# Altium PCB 01.PcbDoc (part 1 of 2)
Units mil, origin at the board's own origin, x right, y up, seen from the top; angles counter-clockwise.
Board outline 1732.26 x 1717.09 mil, 4 copper layers (Top Layer, Layer 1, Layer 2, Bottom Layer), stack 61.855 mil thick; 174 components, 95 nets, 460 pads, 94 vias.
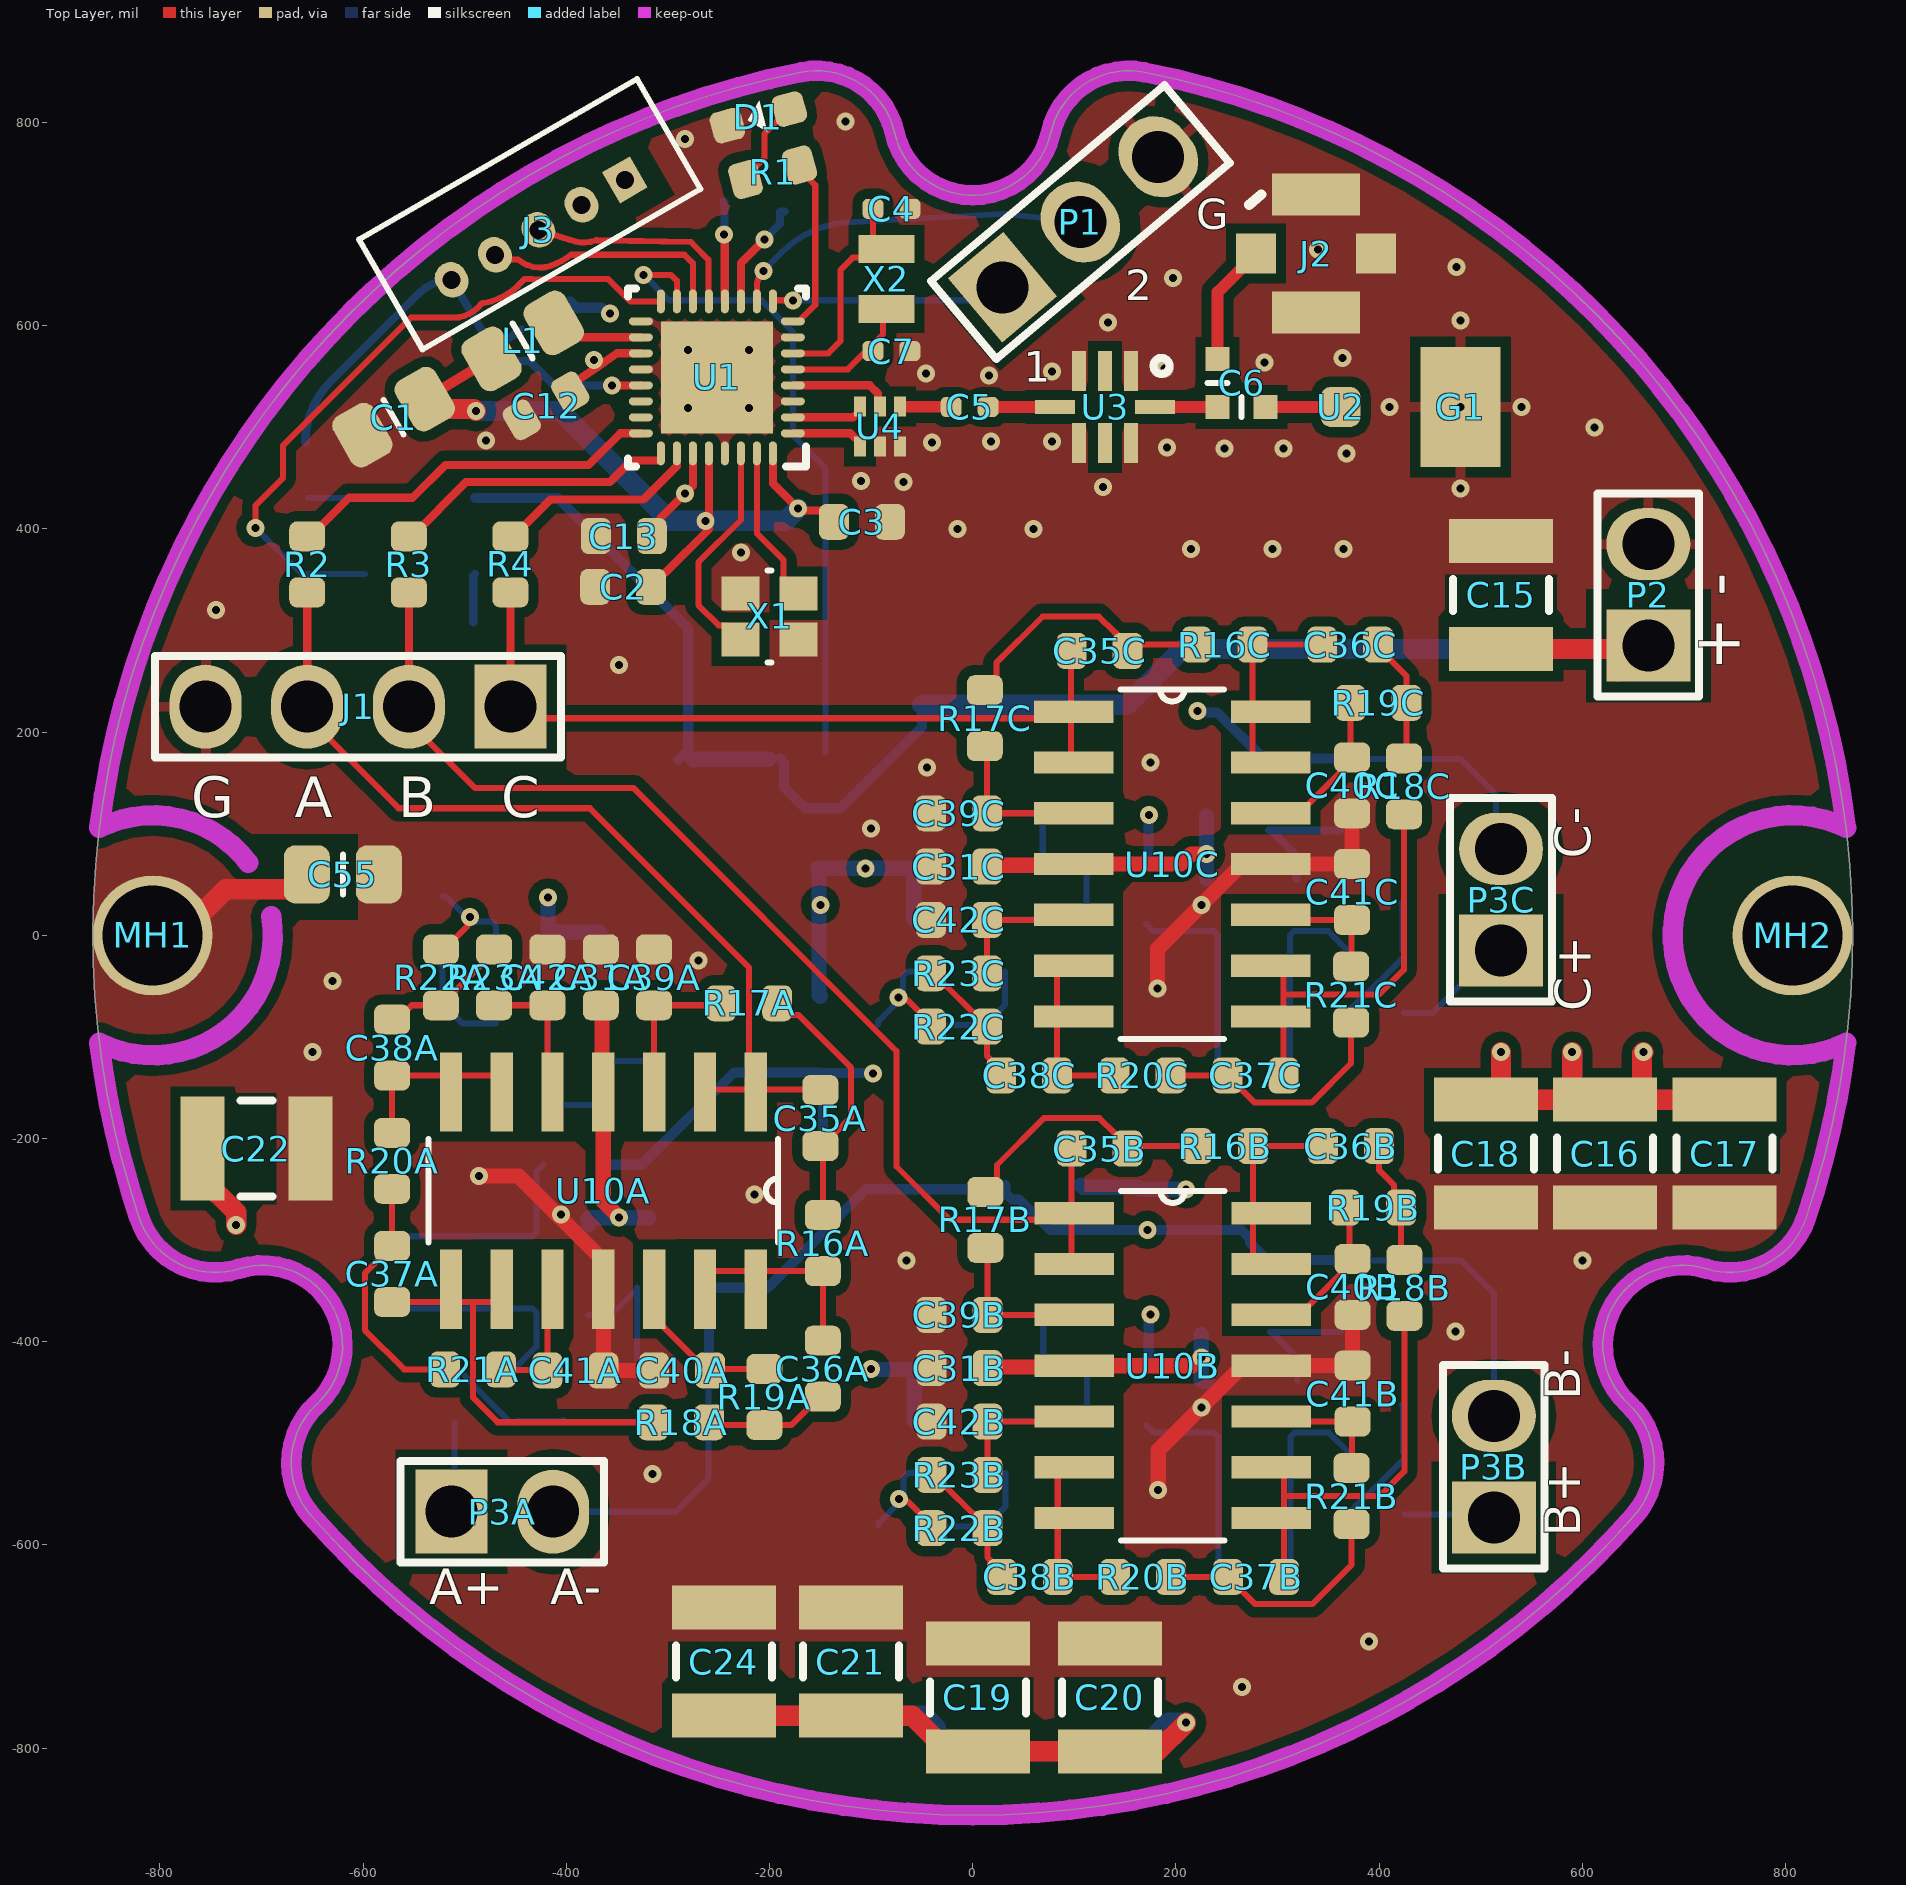
[diagram p0: Top Layer view]
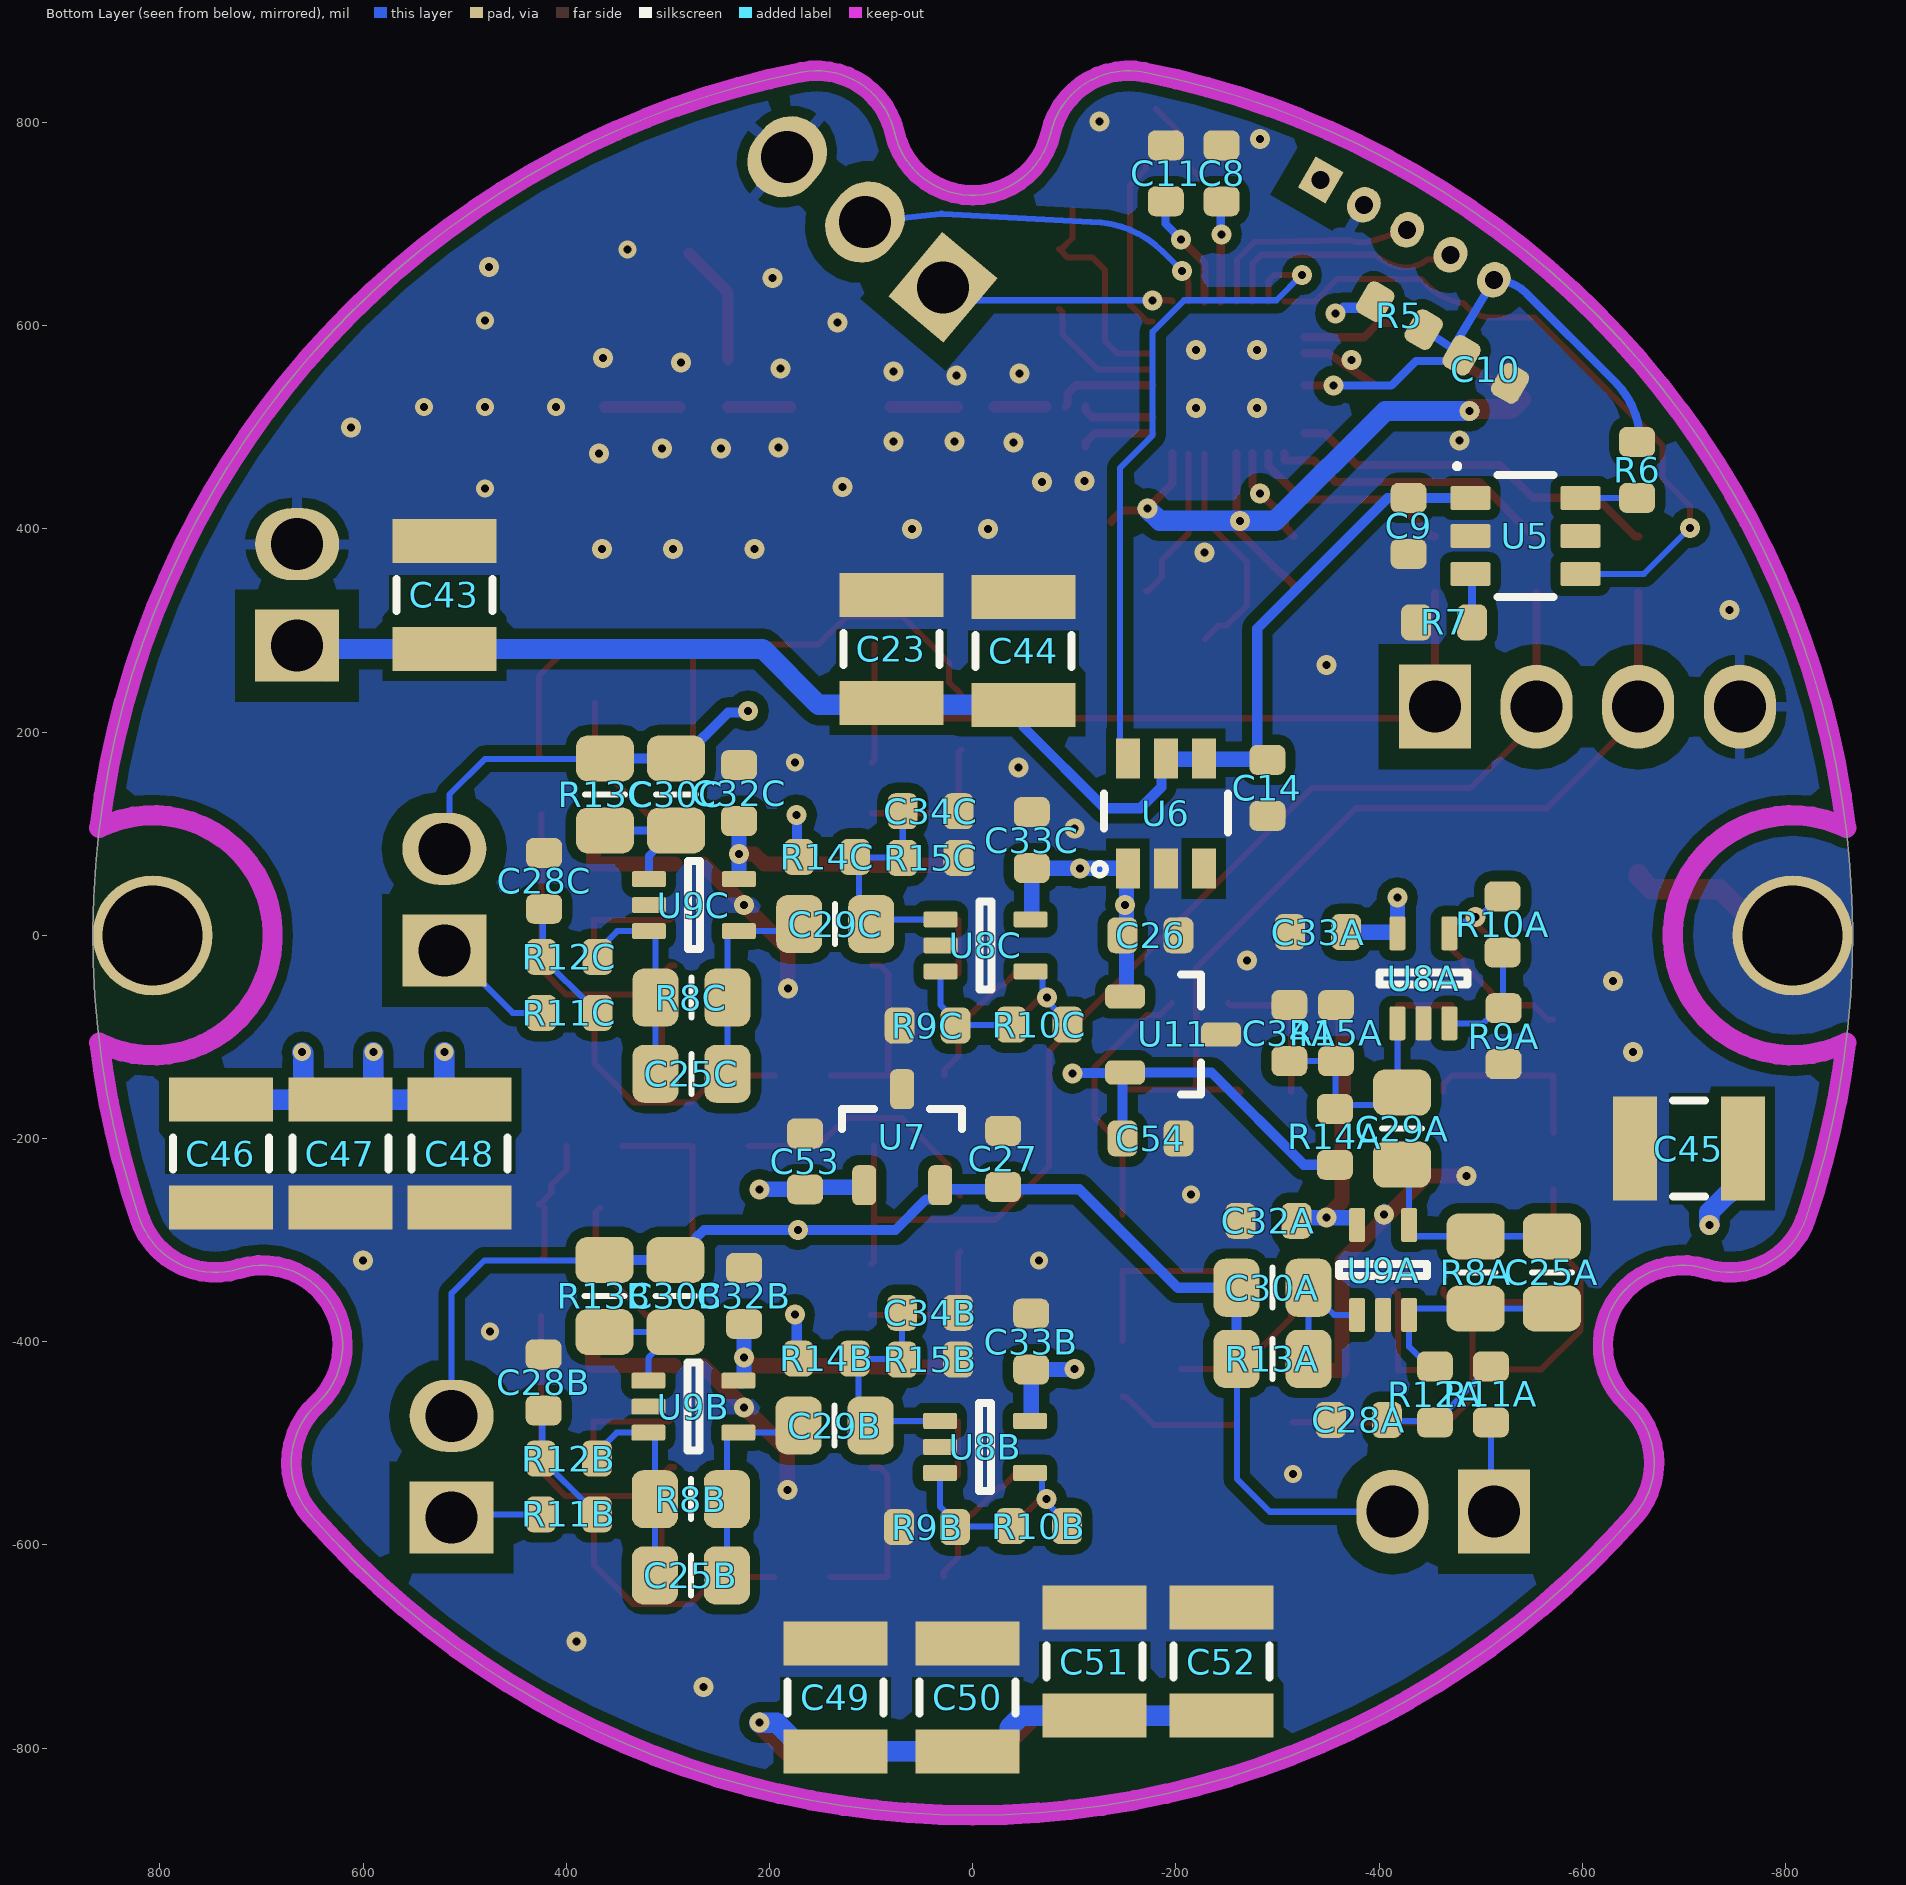
[diagram p1: Bottom Layer view, seen from below]
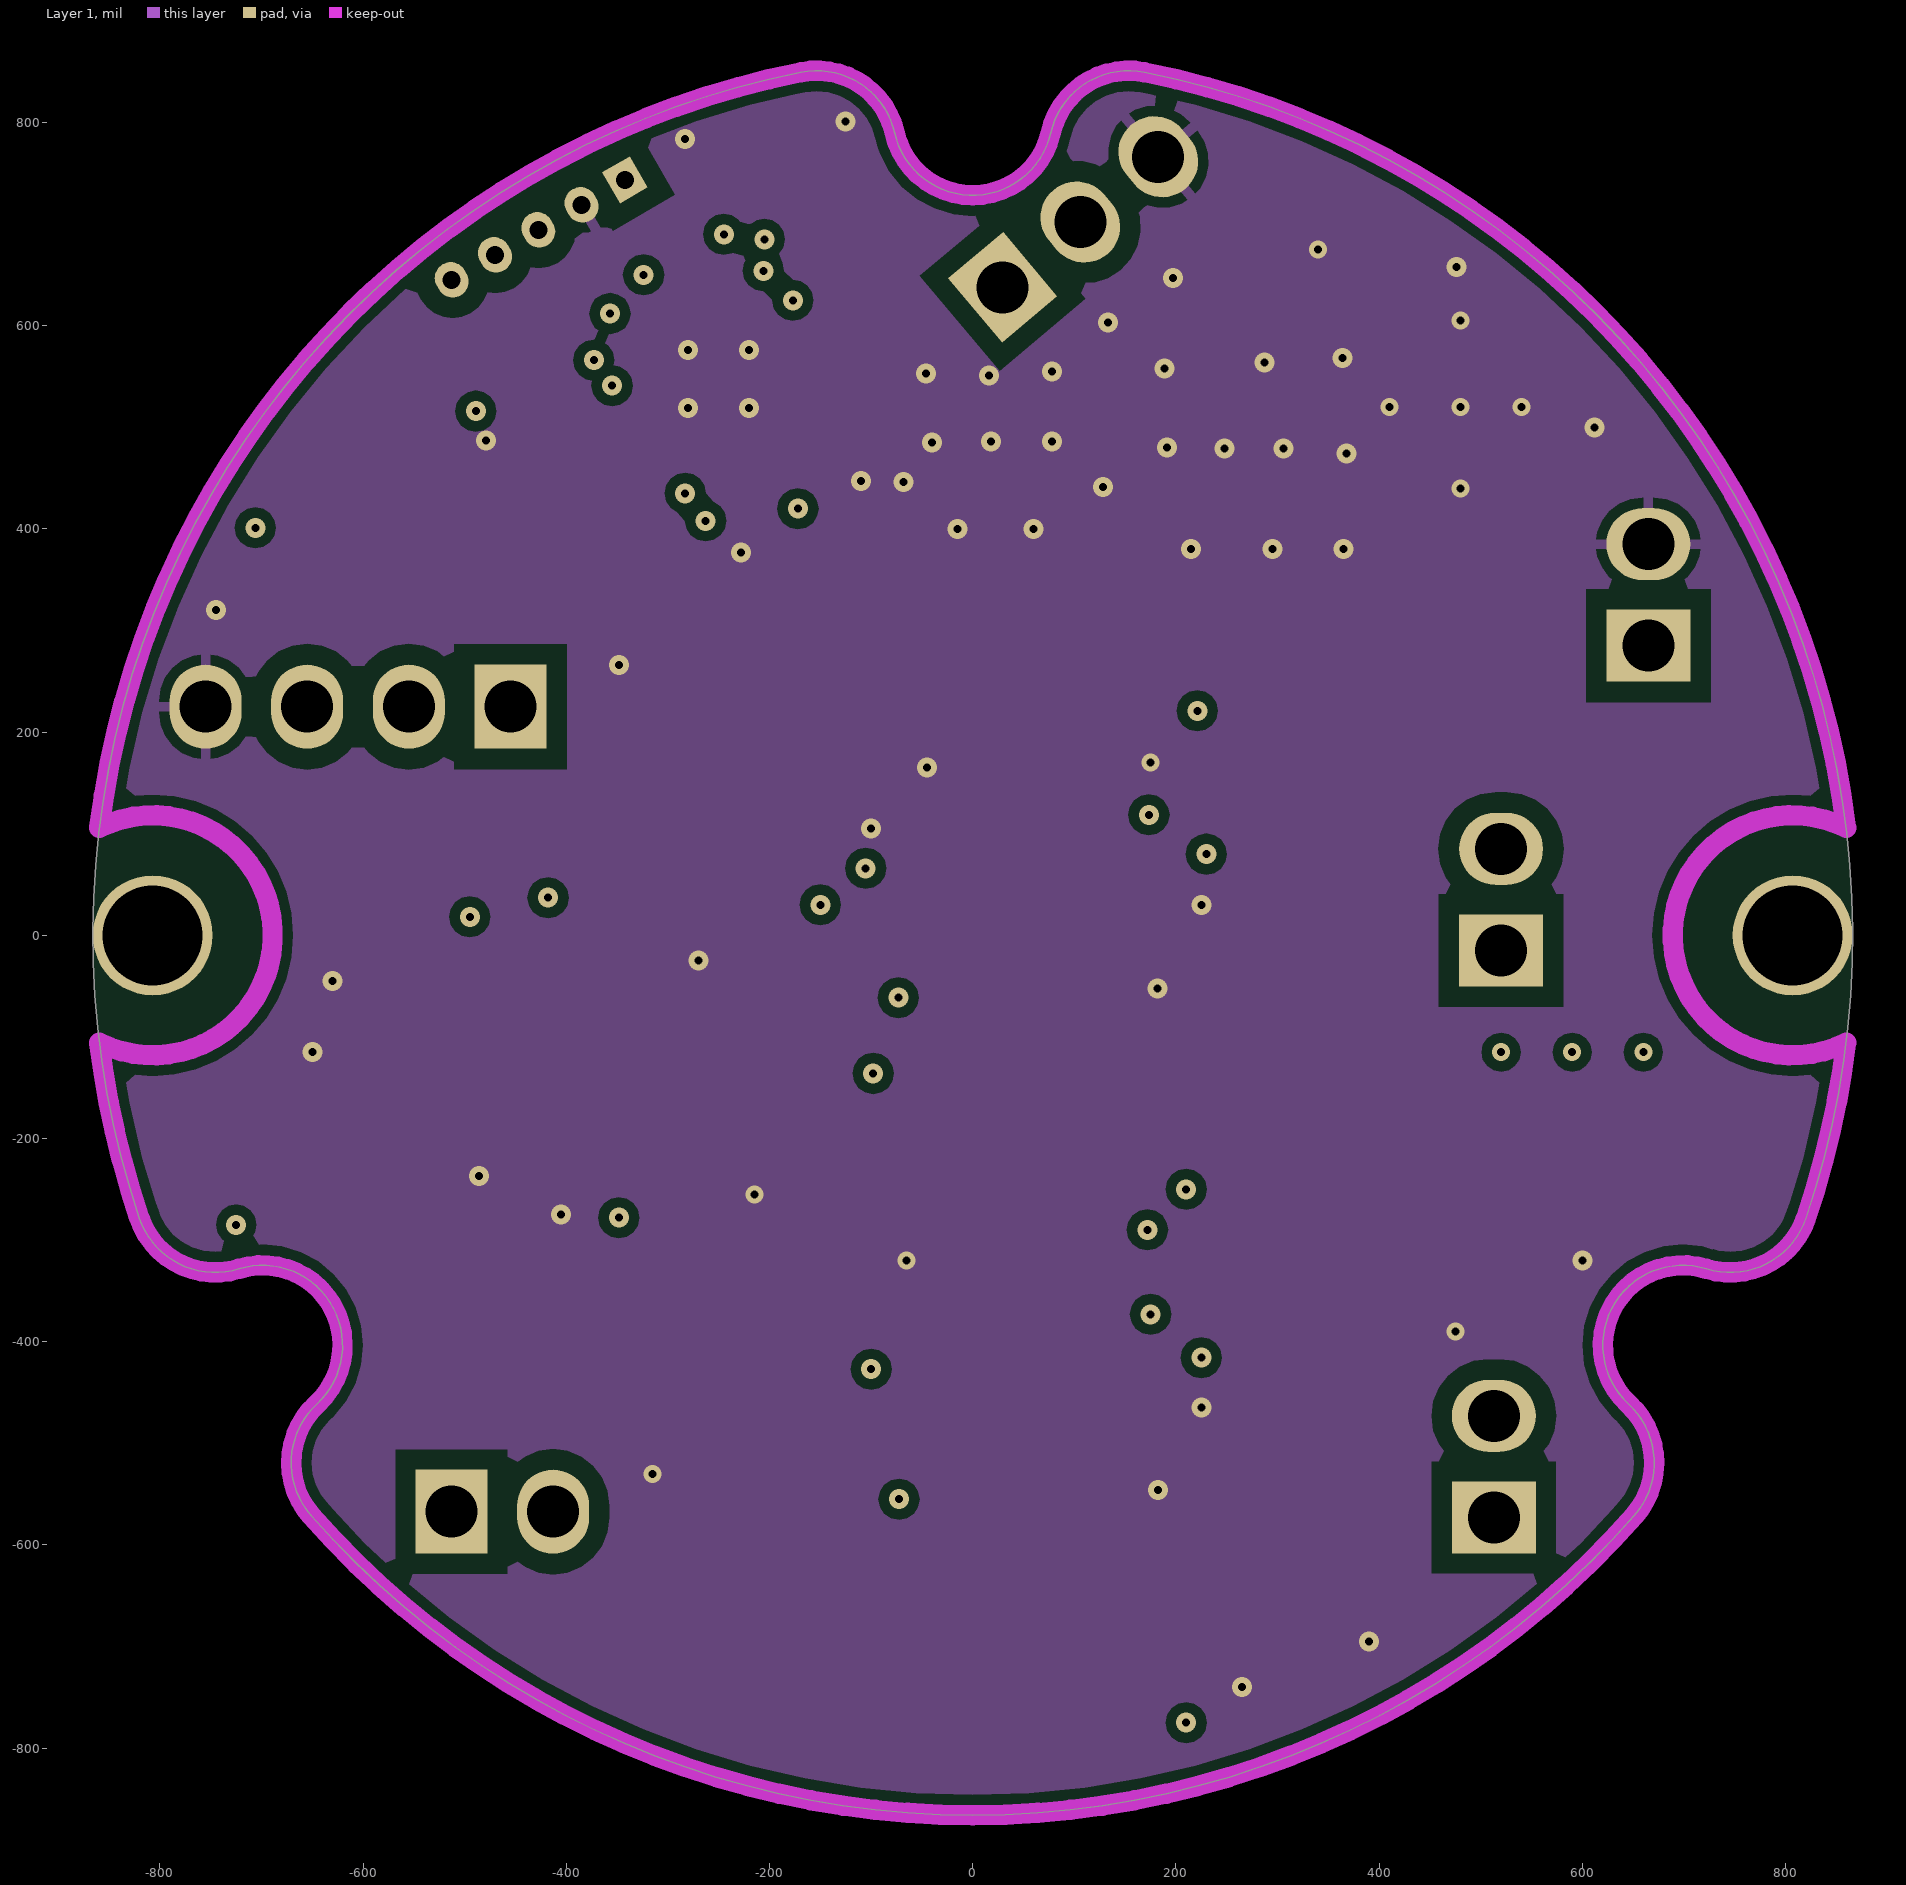
[diagram p2: Layer 1]
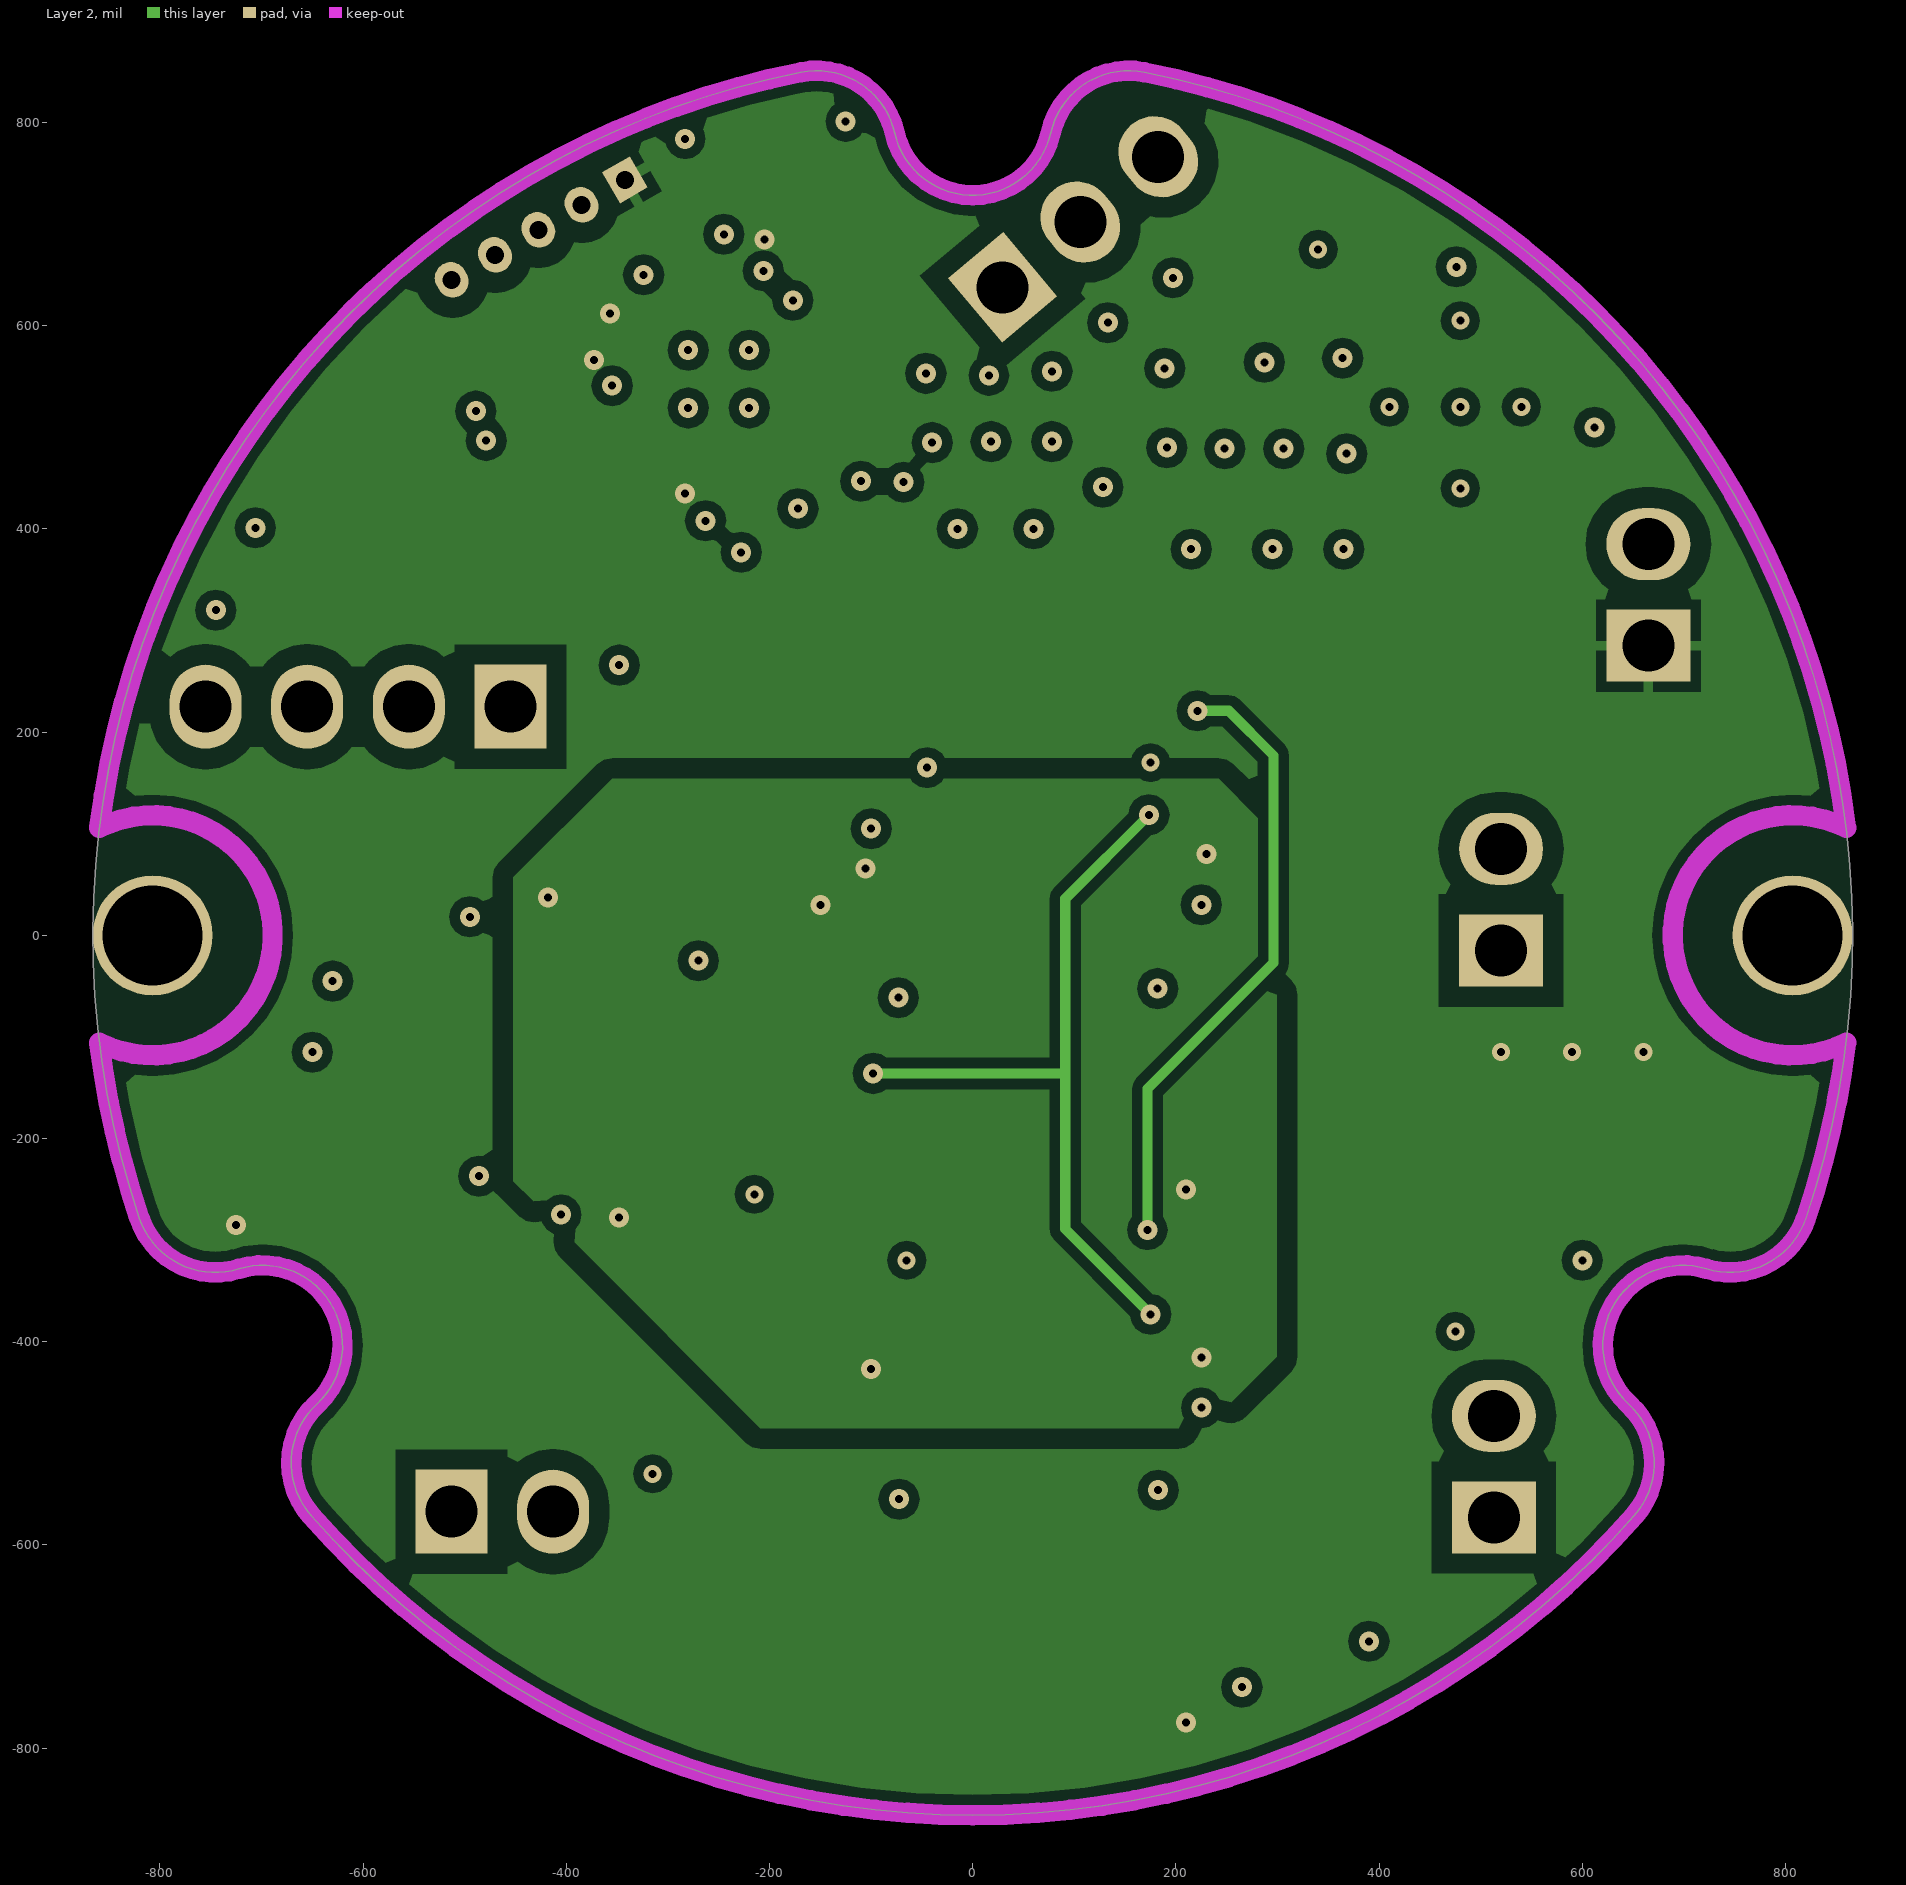
[diagram p3: Layer 2]

## Layer stack, top to bottom
Top Solder: solder mask 0.4, Solder Resist, Dk 3.5
Top Layer: signal copper 1.4
Dielectric 2: prepreg 7.874, PP-006, Dk 4.1
Layer 1: signal copper 0.689
Dielectric 1: dielectric 41.9291, FR-4, Dk 4.8
Layer 2: signal copper 0.689
Dielectric 3: prepreg 7.874, PP-006, Dk 4.1
Bottom Layer: signal copper 1.4
Bottom Solder: solder mask 0.4, Solder Resist, Dk 3.5

## Board outline
-651.23,-571.05 cw(c-592.03,-519.14) -645.5,-461.34 ccw(c-698.97,-403.54) -722.29,-328.33 cw(c-745.61,-253.12) -820.17,-278.44 cw(c-0.01,0.01) -168.95,849.51 cw(c-153.59,772.29) -76.8,789.69 ccw(c-0.01,807.09) 76.78,789.69 cw(c153.58,772.29) 168.94,849.51 cw(c-0.01,0.01) 820.16,-278.44 cw(c745.6,-253.12) 722.27,-328.33 ccw(c698.95,-403.54) 645.48,-461.34 cw(c592.01,-519.14) 651.21,-571.05 cw(c-0.01,0.01)

## Design rules (kind name [scope] priority, off if disabled: settings)
Clearance Clearance_1 [InNamedPolygon('GND_L01_P002')] p1: gap=8 ignorepadtopadclearanceinfootprint=TRUE except(0: Arc-Hole Track-Hole SMDPad-Hole THPad-Hole Via-Hole Fill-Hole Poly-Hole Region-Hole Text-Hole; 6: Arc-Arc Arc-Track Arc-SMDPad Arc-Via Track-Track Track-SMDPad Track-Via SMDPad-SMDPad SMDPad-Via Via-Via; 10: Arc-Text Track-Text SMDPad-Text THPad-Text Via-Text Fill-Text Poly-Text Region-Text Text-Text; 15: Arc-THPad Track-THPad THPad-THPad; 20: SMDPad-THPad THPad-Via)
Clearance [All] p2: gap=10 ignorepadtopadclearanceinfootprint=TRUE except(0: Arc-Hole Track-Hole SMDPad-Hole THPad-Hole Via-Hole Fill-Hole Poly-Hole Region-Hole Text-Hole; 6: Arc-Arc Arc-Track Arc-SMDPad Arc-Via Track-Track Track-SMDPad Track-Via SMDPad-SMDPad SMDPad-Via Via-Via; 15: Track-THPad THPad-THPad; 20: SMDPad-THPad SMDPad-Region THPad-Via THPad-Fill THPad-Poly THPad-Region Fill-Poly Poly-Poly)
ComponentClearance [All] p1: gap=0 collisioncheckmode=3 verticalgap=0 showdistances=FALSE
HoleSize [All] p1: absolutevalues=TRUE maxlimit=248.03 minlimit=7.87 maxpercent=80.000 minpercent=20.000
MinimumSolderMaskSliver [All] p1: minsoldermaskwidth=0
PlaneConnect [All] p1: pad.planeconnectstyle=Relief pad.reliefexpansion=20 pad.reliefentries=4 pad.reliefconductorwidth=10 pad.reliefairgap=10 via.planeconnectstyle=Direct via.reliefexpansion=20 via.reliefentries=4 via.reliefconductorwidth=10 via.reliefairgap=10
PolygonConnect PolygonConnect_2 [InNet('NetC55_2')] p1: connectstyle=Direct reliefconductorwidth=10 reliefentries=4 polygonreliefangle="90 Angle" airgapwidth=10
PolygonConnect PolygonConnect_1 [InComponent('G1')] p2: connectstyle=Relief reliefconductorwidth=10 reliefentries=4 polygonreliefangle="90 Angle" airgapwidth=10
PolygonConnect [All] p3: thpad.connectstyle=Relief thpad.reliefconductorwidth=10 thpad.reliefentries=4 thpad.polygonreliefangle="90 Angle" thpad.airgapwidth=10 smdpad.connectstyle=Direct smdpad.reliefconductorwidth=10 smdpad.reliefentries=4 smdpad.polygonreliefangle="90 Angle" smdpad.airgapwidth=10 via.connectstyle=Direct via.reliefconductorwidth=10 via.reliefentries=4 via.polygonreliefangle="90 Angle" via.airgapwidth=10
RoomDefinition CH3 [InComponentClass('CH3')] p1: confinementstyle=ConfineIn formatcopy=TRUE lockcomponents=FALSE outline 575,-175 575,318.66 -115,318.66 -115,-175
RoomDefinition CH1 [InComponentClass('CH1')] p2: confinementstyle=ConfineIn formatcopy=TRUE lockcomponents=FALSE outline -608.66,-625 -115,-625 -115,60 -608.66,60
RoomDefinition CH2 [InComponentClass('CH2')] p3: confinementstyle=ConfineIn formatcopy=TRUE lockcomponents=FALSE outline 570.55,-668.66 570.55,-175 -114.45,-175 -114.45,-668.66
RoutingVias [All] p1: holewidth=7.87 width=17.72 viastyle="Through Hole" minholewidth=7.87 minwidth=17.72 maxholewidth=248.03 maxwidth=275.59
SilkToSilkClearance [All] p1: silktosilkclearance=0
SilkToSolderMaskClearance [IsPad] p1: minsilkscreentomaskgap=1 clearancetoexposedcopper=TRUE
SolderMaskExpansion [All] p1: expansion=4 istentingtop=FALSE
Width [All] p1: maxlimit=39.37 minlimit=5.91 preferedwidth=10
24 further rules are at their usual default settings.

## Classes and differential pairs
channel class Channel: CH1 CH2 CH3
component class CH3: C25C C28C C29C C30C C31C C32C C33C C34C C35C C36C C37C C38C C39C C40C C41C C42C P3C R8C R9C R10C R11C R12C R13C R14C R15C R16C R17C R18C R19C R20C R21C R22C R23C U8C U9C U10C
component class CH2: C25B C28B C29B C30B C31B C32B C33B C34B C35B C36B C37B C38B C39B C40B C41B C42B P3B R8B R9B R10B R11B R12B R13B R14B R15B R16B R17B R18B R19B R20B R21B R22B R23B U8B U9B U10B
component class CH1: C25A C28A C29A C30A C31A C32A C33A C34A C35A C36A C37A C38A C39A C40A C41A C42A P3A R8A R9A R10A R11A R12A R13A R14A R15A R16A R17A R18A R19A R20A R21A R22A R23A U8A U9A U10A
component class 01: C1 C2 C3 C4 C5 C6 C7 C8 C9 C10 C11 C12 C13 C14 C15 C16 C17 C18 C19 C20 C21 C22 C23 C24 C26 C27 C43 C44 C45 C46 C47 C48 C49 C50 C51 C52 C53 C54 C55 D1 G1 J1 J2 J3 L1 MH1 MH2 P1 P2 R1 R2 R3 R4 R5 R6 R7 U1 U2 U3 U4 U5 U6 U7 U11 X1 X2

## Components (designator, comment, footprint, x,y, rotation, side; value= is the part's Value field where it differs from the comment)
C1 "22uF" S0805C -570,510 r30 top
C2 "100nF" S0603C -344,343 r0 top
C3 "100nF" S0603C -109,407 r180 top
C4 "12pF" S0402C -80,715 r0 top
C5 "100pF" S0402C -3,520 r0 top
C6 "100pF" ST0402C 264.62,520 r0 top
C7 "12pF" S0402C -80,575 r0 top
C8 "1uF" S0603C -245,750 r270 bottom
C9 "100nF" S0603C -429,403 r270 bottom
C10 "100nF" S0603C -505,557 r210 bottom
C11 "100nF" S0603C -190,750 r90 bottom
C12 "100nF" S0603C -420,521 r210 top
C13 "100nF" S0603C -343.44,393 r180 top
C14 "100nF" S0603C -290,145 r270 bottom
C15 "100uF" S1210C 520,335 r270 top
C16 "100uF" S1210C 622.5,-215 r90 top
C17 "100uF" S1210C 740,-215 r90 top
C18 "100uF" S1210C 505,-215 r90 top
C19 "100uF" S1210C 5,-750 r270 top
C20 "100uF" S1210C 135,-750 r270 top
C21 "100uF" S1210C -120,-715 r270 top
C22 "100uF" S1210C -705,-210 r180 top
C23 "100uF" S1210C 80,281.85 r270 bottom
C24 "100uF" S1210C -245,-715 r270 top
C25A "22nF" S0805C -570,-331.89 r270 bottom (schematic designator C25)
C25B "22nF" S0805C 277.44,-630 r0 bottom (schematic designator C25)
C25C "22nF" S0805C 276.89,-136.34 r0 bottom (schematic designator C25)
C26 "1uF" S0603C -175,0 r180 bottom
C27 "1uF" S0603C -30,-220 r90 bottom
C28A "1nF" S0603C -380,-476.89 r0 bottom (schematic designator C28)
C28B "1nF" S0603C 422.44,-440 r90 bottom (schematic designator C28)
C28C "1nF" S0603C 421.89,53.66 r90 bottom (schematic designator C28)
C29A "10uF" S0805C -422.56,-190.33 r270 bottom (schematic designator C29)
C29B "10uF" S0805C 135.88,-482.56 r0 bottom (schematic designator C29)
C29C "10uF" S0805C 135.33,11.1 r0 bottom (schematic designator C29)
C30A "22nF" S0805C -295,-346.89 r0 bottom (schematic designator C30)
C30B "22nF" S0805C 292.44,-355 r90 bottom (schematic designator C30)
C30C "22nF" S0805C 291.89,138.66 r90 bottom (schematic designator C30)
C31A "100nF" S0603C -366.06,-41.33 r90 top (schematic designator C31)
C31B "100nF" S0603C -13.12,-426.06 r180 top (schematic designator C31)
C31C "100nF" S0603C -13.67,67.6 r180 top (schematic designator C31)
C32A "100nF" S0603C -291,-281 r0 bottom (schematic designator C32)
C32B "100nF" S0603C 225,-355 r90 bottom (schematic designator C32)
C32C "100nF" S0603C 230,140 r90 bottom (schematic designator C32)
C33A "100nF" S0603C -340,3.11 r0 bottom (schematic designator C33)
C33B "100nF" S0603C -57.56,-400 r90 bottom (schematic designator C33)
C33C "100nF" S0603C -58.11,93.66 r90 bottom (schematic designator C33)
C34A "1nF" S0603C -311.56,-96.33 r270 bottom (schematic designator C34)
C34B "1nF" S0603C 41.88,-371.56 r0 bottom (schematic designator C34)
C34C "1nF" S0603C 41.33,122.1 r0 bottom (schematic designator C34)
C35A "10nF" S0603C -150,-180 r90 top (schematic designator C35)
C35B "10nF" S0603C 125,-210 r180 top (schematic designator C35)
C35C "10nF" S0603C 125,280 r180 top (schematic designator C35)
C36A "10nF" S0603C -147.56,-426.58 r90 top (schematic designator C36)
C36B "10nF" S0603C 372.13,-207.56 r180 top (schematic designator C36)
C36C "10nF" S0603C 371.58,286.1 r180 top (schematic designator C36)
C37A "10nF" S0603C -571.56,-333.33 r270 top (schematic designator C37)
C37B "10nF" S0603C 278.88,-631.56 r0 top (schematic designator C37)
C37C "10nF" S0603C 278.33,-137.9 r0 top (schematic designator C37)
C38A "10nF" S0603C -571.56,-110.58 r270 top (schematic designator C38)
C38B "10nF" S0603C 56.13,-631.56 r0 top (schematic designator C38)
C38C "10nF" S0603C 55.58,-137.9 r0 top (schematic designator C38)
C39A "82pF" S0603C -313.56,-41.33 r270 top (schematic designator C39)
C39B "82pF" S0603C -13.12,-373.56 r0 top (schematic designator C39)
C39C "82pF" S0603C -13.67,120.1 r0 top (schematic designator C39)
C40A "1nF" S0603C -286,-428.33 r180 top (schematic designator C40)
C40B "1nF" S0603C 373.88,-346 r270 top (schematic designator C40)
C40C "1nF" S0603C 373.33,147.66 r270 top (schematic designator C40)
C41A "3.3nF" S0603C -391,-428.33 r180 top (schematic designator C41)
C41B "3.3nF" S0603C 373.88,-451 r270 top (schematic designator C41)
C41C "3.3nF" S0603C 373.33,42.66 r270 top (schematic designator C41)
C42A "8.2nF" S0603C -418.56,-41.33 r270 top (schematic designator C42)
C42B "8.2nF" S0603C -13.12,-478.56 r0 top (schematic designator C42)
C42C "8.2nF" S0603C -13.67,15.1 r0 top (schematic designator C42)
C43 "100uF" S1210C 520,335 r270 bottom
C44 "100uF" S1210C -50,280 r270 bottom
C45 "100uF" S1210C -705,-210 r180 bottom
C46 "100uF" S1210C 740,-215 r90 bottom
C47 "100uF" S1210C 622.5,-215 r90 bottom
C48 "100uF" S1210C 505,-215 r90 bottom
C49 "100uF" S1210C 135,-750 r270 bottom
C50 "100uF" S1210C 5,-750 r270 bottom
C51 "100uF" S1210C -120,-715 r270 bottom
C52 "100uF" S1210C -245,-715 r270 bottom
C53 "1uF" S0603C 165,-222.44 r90 bottom
C54 "1uF" S0603C -175,-200 r180 bottom
C55 "1nF" S0805C -620,60 r180 top
D1 "MHT192WDT-C2" LED0603 -211,805 r15 top
G1 "PAD" P3X2 480.12,520 r0 top
J1 "Header 4" CP1X4 -455,225 r180 top
J2 "IPEX" molex-73412 338,671 r270 top
J3 "530470510" 1.25MM_P5 -342.38,743.61 r300 top
L1 "6.8uH" S0805L -443,585 r30 top
MH1 "HOLE_PTH" Pad_2-5_3 -807.09,0 r0 top locked
MH2 "HOLE_PTH" Pad_2-5_3 807.09,0 r0 top locked
P1 "Header 3" CP1X3 29.4,637.72 r40 top
P2 "Header 2" CP1X2 665,285 r90 top
P3A "Header 2" CP1X2 -513,-567.33 r0 top (schematic designator P3)
P3B "Header 2" CP1X2 512.88,-573 r90 top (schematic designator P3)
P3C "Header 2" CP1X2 520,-15 r90 top (schematic designator P3)
R1 "330R" S0603R -197,751 r195 top
R2 "0R" S0603R -655,365 r90 top
R3 "0R" S0603R -555,365 r90 top
R4 "0R" S0603R -455,365 r90 top
R5 "100K" S0603R -420,610 r30 bottom
R6 "0R" S0603R -654,458 r90 bottom
R7 "10K" S0603R -464,308 r0 bottom
R8A "100M" S0805R -495,-331.89 r90 bottom (schematic designator R8)
R8B "100M" S0805R 277.44,-555 r180 bottom (schematic designator R8)
R8C "100M" S0805R 276.89,-61.34 r180 bottom (schematic designator R8)
R9A "100K" S0603R -522.56,-99.33 r270 bottom (schematic designator R9)
R9B "100K" S0603R 44.88,-582.56 r0 bottom (schematic designator R9)
R9C "100K" S0603R 44.33,-88.9 r0 bottom (schematic designator R9)
R10A "24.9K" S0603R -521.56,10.67 r270 bottom (schematic designator R10)
R10B "24.9K" S0603R -65.12,-581.56 r0 bottom (schematic designator R10)
R10C "24.9K" S0603R -65.67,-87.9 r0 bottom (schematic designator R10)
R11A "1K" S0603R -510,-451.89 r90 bottom (schematic designator R11)
R11B "1K" S0603R 397.44,-570 r180 bottom (schematic designator R11)
R11C "1K" S0603R 396.89,-76.34 r180 bottom (schematic designator R11)
R12A "1K" S0603R -455,-451.89 r90 bottom (schematic designator R12)
R12B "1K" S0603R 397.44,-515 r180 bottom (schematic designator R12)
R12C "1K" S0603R 396.89,-21.34 r180 bottom (schematic designator R12)
R13A "100M" S0805R -295,-416.89 r180 bottom (schematic designator R13)
R13B "100M" S0805R 362.44,-355 r270 bottom (schematic designator R13)
R13C "100M" S0805R 361.89,138.66 r270 bottom (schematic designator R13)
R14A "200K" S0603R -356.56,-198.33 r90 bottom (schematic designator R14)
R14B "200K" S0603R 143.88,-416.56 r180 bottom (schematic designator R14)
R14C "200K" S0603R 143.33,77.1 r180 bottom (schematic designator R14)
R15A "330k" S0603R -357.56,-96.33 r90 bottom (schematic designator R15)
R15B "330k" S0603R 41.88,-417.56 r180 bottom (schematic designator R15)
R15C "330k" S0603R 41.33,76.1 r180 bottom (schematic designator R15)
R16A "47.5K" S0603R -147.56,-302.86 r90 top (schematic designator R16)
R16B "47.5K" S0603R 248.41,-207.56 r180 top (schematic designator R16)
R16C "47.5K" S0603R 247.86,286.1 r180 top (schematic designator R16)
R17A "110K" S0603R -220,-66.89 r180 top (schematic designator R17)
R17B "110K" S0603R 12.44,-280 r270 top (schematic designator R17)
R17C "110K" S0603R 11.89,213.66 r270 top (schematic designator R17)
R18A "17.4K" S0603R -287,-479.33 r0 top (schematic designator R18)
R18B "17.4K" S0603R 424.88,-347 r90 top (schematic designator R18)
R18C "17.4K" S0603R 424.33,146.66 r90 top (schematic designator R18)
R19A "34.8K" S0603R -205,-454.33 r90 top (schematic designator R19)
R19B "34.8K" S0603R 394,-268 r180 top (schematic designator R19)
R19C "34.8K" S0603R 399.33,228.66 r180 top (schematic designator R19)
R20A "10.7K" S0603R -571.56,-221.96 r270 top (schematic designator R20)
R20B "10.7K" S0603R 167.51,-631.56 r0 top (schematic designator R20)
R20C "10.7K" S0603R 166.96,-137.9 r0 top (schematic designator R20)
R21A "26.1K" S0603R -492,-427.33 r0 top (schematic designator R21)
R21B "26.1K" S0603R 372.88,-552 r90 top (schematic designator R21)
R21C "26.1K" S0603R 372.33,-58.34 r90 top (schematic designator R21)
R22A "10K" S0603R -523.56,-41.33 r270 top (schematic designator R22)
R22B "10K" S0603R -13.12,-583.56 r0 top (schematic designator R22)
R22C "10K" S0603R -13.67,-89.9 r0 top (schematic designator R22)
R23A "17.8K" S0603R -471.06,-41.33 r270 top (schematic designator R23)
R23B "17.8K" S0603R -13.12,-531.06 r0 top (schematic designator R23)
R23C "17.8K" S0603R -13.67,-37.4 r0 top (schematic designator R23)
U1 "CC1310F128RSMR" RSM0032B_NV -251.87,549.2 r180 top
U2 "ANTENNA_PCB" P1X1 362,520 r0 top
U3 "0900LP15B0063" 8P0805 155.8,555.43 r270 top
U4 "0850BM14E0016" 6P0603 -71.63,520.37 r270 top
U5 "TPL5010DDCR" DDC0006A_N -544,393 r180 bottom
U6 "TPS22860DBVR" DBV0006A_N -190,120 r90 bottom
U7 "ISL21080DIH309Z-TK" SOT-23 69.4,-198.76 r90 bottom
U8A "TLV333IDCK" DCK0005A_N -443.56,-42.33 r90 bottom (schematic designator U8)
U8B "TLV333IDCK" DCK0005A_N -12.12,-503.56 r180 bottom (schematic designator U8)
U8C "TLV333IDCK" DCK0005A_N -12.67,-9.9 r180 bottom (schematic designator U8)
U9A "OPA313IDCKR" DCK0005A_N -403.95,-329.44 r90 bottom (schematic designator U9)
U9B "OPA313IDCKR" DCK0005A_N 274.99,-463.95 r180 bottom (schematic designator U9)
U9C "OPA313IDCKR" DCK0005A_N 274.44,29.71 r180 bottom (schematic designator U9)
U10A "TLV4333IDR" D14 -363.56,-251.33 r270 top (schematic designator U10)
U10B "TLV4333IDR" D14 196.88,-423.56 r0 top (schematic designator U10)
U10C "TLV4333IDR" D14 196.33,70.1 r0 top (schematic designator U10)
U11 "ISL21080DIH309Z-TK" SOT-23 -197.24,-97.6 r180 bottom
X1 "24MHZ" SMD-2016 -200,314 r270 top
X2 "32.768k" SMD-2012 -85,646 r90 top

## Footprints (in the part's own frame and the unit in brackets; to place one, negate y for a bottom-side part, rotate by r counter-clockwise, add the part's x,y. Pads: shape width x height; smd on the part's side, far side on the other; paste and mask are expansions set on the pad)
1.25MM_P5 [mm]
  rect 0.9x0.8 hole 0.45: 1(0,0)
  oval 0.9x0.8 hole 0.45: 2(0,-1.25) 3(0,-2.5) 4(0,-3.75) 5(0,-5)
  silkscreen extent -2.03,-6.5 1.14,1.52, body extent -2.06,-6.48 1.14,1.52, height 4.28
6P0603 [mm]
  rect 0.5x0.3 smd: 1(0,0) 2(0,-0.5) 3(0,-1) 4(1,-1) 5(1,-0.5) 6(1,0)
  body extent 0.1,-1.3 0.9,0.3, height 0.6
8P0805 [mm]
  rect 1x0.35 smd: 1(0,0) 2(0,-0.65) 3(0,-1.3) 5(1.8,-1.3) 6(1.8,-0.65) 7(1.8,0)
  rect 0.35x1 smd: 4(0.9,-1.9) 8(0.9,0.6)
  silkscreen extent -0.33,0.56 0.07,0.96, body extent 0.25,-1.65 1.52,0.38, height 0.6
CP1X2 [mm]
  rect 1.8x2.1 hole 1.3: 1(0,0)
  oval 1.8x2.1 hole 1.3: 2(2.54,0)
  silkscreen extent -1.27,-1.27 3.81,1.27
CP1X3 [mm]
  rect 1.8x2.1 hole 1.3: 1(0,0)
  oval 1.8x2.1 hole 1.3: 2(2.54,0) 3(5.08,0)
  silkscreen extent -1.27,-1.27 6.35,1.27
CP1X4 [mm] "Connector; Header; 4 Position"
  rect 1.8x2.1 hole 1.3: 1(0,0)
  oval 1.8x2.1 hole 1.3: 2(2.54,0) 3(5.08,0) 4(7.62,0)
  silkscreen extent -1.27,-1.27 8.89,1.27
D14 [mil]
  rect 78x22 smd: 1(-97,150) 2(-97,100) 3(-97,50) 4(-97,0) 5(-97,-50) 6(-97,-100) 7(-97,-150) 8(97,-150) 9(97,-100) 10(97,-50) 11(97,0) 12(97,50) 13(97,100) 14(97,150)
  silkscreen extent -51,-172 51,172, body extent -122,-172 122,172, height 69
DBV0006A_N [mm]
  rect 1x0.6 smd paste+0 mask+0.051: 1(-1.375,0.95) 2(-1.375,0) 3(-1.375,-0.95) 4(1.375,-0.95) 5(1.375,0) 6(1.375,0.95)
  silkscreen extent -1.55,-1.55 0.5,1.8, body extent -0.76,-1.4 0.76,1.4, height 0.25
DCK0005A_N [mm]
  rrect25% 0.85x0.4 smd: 1(-1.125,0.65) 2(-1.125,0) 3(-1.125,-0.65) 4(1.125,-0.65) 5(1.125,0.65)
  silkscreen extent -0.15,-1.1 0.15,1.1, body extent -0.71,-1.07 0.71,1.07, height 1
DDC0006A_N [mm]
  rrect17% 1x0.6 smd: 1(-1.375,0.95) 2(-1.375,0) 3(-1.375,-0.95) 4(1.375,-0.95) 5(1.375,0) 6(1.375,0.95)
  silkscreen extent -1.76,-1.52 0.7,1.8, body extent -1.19,-1.17 1.22,1.19, height 1
LED0603 [mm]
  rrect50% 0.8x0.8 smd: 1(-0.8,0) 2(0.8,0)
  silkscreen extent -0.27,-0.4 0.13,0.4, body extent -0.85,-0.45 0.85,0.45, height 0.8
molex-73412 [mm]
  rect 1x1 smd: 1(0,-1.5) 3(0,1.5)
  rect 1.05x2.2 smd: 2(1.475,0) 4(-1.475,0)
  silkscreen extent -1.47,-1.68 -1.22,-1.37, body extent -1.5,-1.54 1.5,1.54, height 1.5
P1X1 [mm]
  rrect50% 1x1 smd: 1(0,0)
P3X2 [mm]
  rect 2x3 smd: 1(0,0)
Pad_2-5_3 [mm]
  round 3 hole 2.5: 1(0,0)
RSM0032B_NV [mm]
  oval 0.6x0.2 smd paste+0 mask+0.051: 1(-1.9,1.4) 2(-1.9,1) 3(-1.9,0.6) 4(-1.9,0.2) 5(-1.9,-0.2) 6(-1.9,-0.6) 7(-1.9,-1) 8(-1.9,-1.4) 17(1.9,-1.4) 18(1.9,-1) 19(1.9,-0.6) 20(1.9,-0.2) 21(1.9,0.2) 22(1.9,0.6) 23(1.9,1) 24(1.9,1.4)
  oval 0.2x0.6 smd paste+0 mask+0.051: 9(-1.4,-1.9) 10(-1,-1.9) 11(-0.6,-1.9) 12(-0.2,-1.9) 13(0.2,-1.9) 14(0.6,-1.9) 15(1,-1.9) 16(1.4,-1.9) 25(1.4,1.9) 26(1,1.9) 27(0.6,1.9) 28(0.2,1.9) 29(-0.2,1.9) 30(-0.6,1.9) 31(-1,1.9) 32(-1.4,1.9)
  rect 2.8x2.8 smd paste-1.387 mask+0.051: 33(0,0)
  silkscreen extent -2.23,-2.23 2.23,2.23, body extent -2.03,-2.03 2.03,2.03, height 0.25
S0402C [mm]
  rrect50% 0.524x0.5 smd: 1(-0.462,0) 2(0.462,0)
  body extent -0.55,-0.3 0.55,0.3, height 0.6
S0603C [mm]
  rrect50% 0.75x0.9 smd: 1(-0.7,0) 2(0.7,0)
  body extent -0.87,-0.47 0.87,0.47, height 0.85
S0603R [mm]
  rrect50% 0.75x0.9 smd: 1(-0.7,0) 2(0.7,0)
  body extent -0.87,-0.47 0.87,0.47, height 0.85
S0805C [mm]
  rrect50% 1.151x1.451 smd: 1(-0.9,0) 2(0.9,0)
  silkscreen extent 0,-0.5 0,0.5, body extent -1.1,-0.72 1.1,0.72, height 1.45
S0805L [mm]
  rrect50% 1.151x1.451 smd: 1(-0.9,0) 2(0.9,0)
  silkscreen extent 0,-0.5 0,0.5, body extent -1.1,-0.72 1.1,0.72, height 1.45
S0805R [mm]
  rrect50% 1.151x1.451 smd: 1(-0.9,0) 2(0.9,0)
  silkscreen extent 0,-0.5 0,0.5, body extent -1.1,-0.72 1.1,0.72, height 1.45
S1210C [mm] "Chip Capacitor, Body 3.2x2.5mm, IPC High Density"
  rect 1.1x2.6 smd: 1(-1.35,0) 2(1.35,0)
  Top Layer pour cut-out: -0.508,-1.397 0.508,-1.397 0.508,1.397 -0.508,1.397
  silkscreen extent -0.4,-1.2 0.4,1.2, body extent -1.65,-1.27 1.65,1.27, height 2.5
SMD-2012 [mm]
  rect 0.7x1.4 smd: 1(-0.75,0) 2(0.75,0)
  body extent -1.05,-0.63 1.05,0.63, height 0.6
SMD-2016 [mm]
  rect 0.85x0.95 smd: 1(-0.575,0.725) 2(-0.575,-0.725) 3(0.575,-0.725) 4(0.575,0.725)
  silkscreen extent -1.15,-0.05 1.15,0.05, body extent -1.14,-1.27 1.14,1.27, height 0.61
SOT-23 [mm]
  rrect50% 1x0.6 smd: 1(-1.2,0.95) 2(-1.2,-0.95) 3(1.2,0)
  silkscreen extent 0.2,-1.5 0.7,1.5, body extent -1.16,-1.45 1.21,1.45, height 1
ST0402C [mm]
  rect 0.6x0.61 smd: 1(-0.6,0)
  rect 0.6x0.6 smd: 2(0.6,0) 3(-0.6,1.2)
  silkscreen extent -0.85,-0.25 0,0.6, body extent -0.55,-0.3 0.55,0.3, height 0.6

## Part data
C1: library part 22uF/0805/16V, "精度 ±20%  / 容值 22uF  / 额定电压 16V  / 温漂系数（介质材料) X5R", A_Manufacturer=元六, Manufacturer=FH(风华), Package=0805, A_Code="J CT41-0805-2R2-16V-226M", A_ComType=二类电容, Code=0805X226M160NT, CompType=Capacitor, DistributorCode=C129302
C2 C3 C9 C10 C11 C12 C13 C14 C31A C31B C31C C32A C32B C32C C33A C33B C33C: library part 100nF/0603/50V, "精度 ±10%  / 容值 100nF  / 额定电压 50V  / 温漂系数（介质材料) X7R", A_Manufacturer=元六, Manufacturer=FH(风华), Package=0603, A_Code="J CT41-0603-2R1-50V-104K", A_ComType=二类电容, Code=0603B104K500NT, CompType=Capacitor, DistributorCode=C30926
C4 C7: library part 12pF/0402/50V, "精度 ±1%  / 容值 12pF  / 额定电压 50V  / 温漂系数（介质材料) C0G", A_Manufacturer=元六, Manufacturer=FH(风华), Package=0402, A_Code="J CC41-0402-CG-50V-120J", A_ComType=一类电容, Code=0402CG120F500NT, CompType=Capacitor, DistributorCode=C182477
C5: library part 100pF/0402/50V, "精度 ±5%  / 容值 100pF  / 额定电压 50V  / 温漂系数（介质材料) C0G", A_Manufacturer=元六, Manufacturer=FH(风华), Package=0402, A_Code="J CC41-0402-CG-50V-101J", A_ComType=一类电容, Code=0402CG101J500NT, CompType=Capacitor, DistributorCode=C1546
C6: library part 100pF/0402/T, "精度 ±5%  / 容值 100pF  / 额定电压 50V  / 温漂系数（介质材料) C0G", A_Manufacturer=元六, Manufacturer=FH(风华), Package=0402, A_Code="J CC41-0402-CG-50V-101J", A_ComType=一类电容, Code=0402CG101J500NT, CompType=Capacitor, DistributorCode=C1546
C8 C26 C27 C53 C54: library part 1uF/0603/50V, "精度 ±10%  / 容值 1uF  / 额定电压 50V  / 温漂系数（介质材料) X7R", A_Manufacturer=元六, Manufacturer=FH(风华), Package=0603, A_Code="J CT41-0603-2R1-50V-105M", A_ComType=二类电容, Code=0603B105K500NT, CompType=Capacitor, DistributorCode=C90540
C15 C16 C17 C18 C19 C20 C21 C22 C23 C24 C43 C44 C45 C46 C47 C48 C49 C50 C51 C52: library part 100uF/1210/6.3V, "精度 ±20%  / 容值 100uF  / 额定电压 6.3V  / 温漂系数（介质材料) X5R", A_Manufacturer=元六, Manufacturer=muRata(村田), Package=1210, A_Code="J CT41-1210-2R2-10V-107M", Code=GRM32ER60J107ME20L, CompType=Capacitor, DistributorCode=C88154
C25A C25B C25C C30A C30B C30C: library part 22nF/0805/50V, "精度 ±5%  / 容值 22nF  / 额定电压 50V  / 温漂系数（介质材料) C0G", A_Manufacturer=元六, Manufacturer=TDK, Package=0805, A_Code="J CC41-0805-CG-50V-223J", A_ComType=一类类电容, Code=C2012C0G1H223JT000N, CompType=Capacitor, DistributorCode=C342593
C28A C28B C28C C34A C34B C34C C40A C40B C40C: library part 1nF/0603/50V, "精度 ±5%  / 容值 1nF  / 额定电压 50V  / 温漂系数（介质材料) C0G", A_Manufacturer=元六, Manufacturer=FH(风华), Package=0603, A_Code="J CC41-0603-CG-50V-102J", Code=0603CG102J500NT, CompType=Capacitor, DistributorCode=C1636
C29A C29B C29C: library part 10uF/0805/16V, "精度 ±10%  / 容值 10uF  / 额定电压 16V  / 温漂系数（介质材料) X7R", A_Manufacturer=元六, Manufacturer=FH(风华), Package=0805, A_Code="J CT41-0805-2R2-16V-106M", A_ComType=二类电容, Code=0805B106K160NT, CompType=Capacitor, DistributorCode=C92341
C35A C35B C35C C36A C36B C36C C37A C37B C37C C38A C38B C38C: library part 10nF/0603/C0G/50V, "精度 ±5%  / 容值 10nF  / 额定电压 50V  / 温漂系数（介质材料) C0G", A_Manufacturer=元六, Manufacturer=FH(风华), Package=0603, A_Code="J CC41-0603-CG-50V-103J", Code=0603CG103J500NT, CompType=Capacitor, DistributorCode=C82282
C39A C39B C39C: library part 82pF/0603/C0G/50V, "精度 ±5%  / 容值 82pF  / 额定电压 50V  / 温漂系数（介质材料) C0G", A_Manufacturer=元六, Manufacturer=FH(风华), Package=0603, A_Code="J CC41-0603-CG-50V-820J", Code=0603CG820J500NT, CompType=Capacitor, DistributorCode=C1683
C41A C41B C41C: library part 3.3nF/0603/50V, "精度 ±5%  / 容值 3.3nF  / 额定电压 50V  / 温漂系数（介质材料) C0G", A_Manufacturer=元六, Manufacturer=FH(风华), Package=0603, A_Code="J CC41-0603-CG-50V-332J", Code=0603CG332J500NT, CompType=Capacitor, DistributorCode=C190576
C42A C42B C42C: library part 8.2nF/0603/C0G, "精度 ±5%  / 容值 8.2nF  / 额定电压 50V  / 温漂系数（介质材料) C0G", A_Manufacturer=元六, Manufacturer=TDK, Package=0603, A_Code="J CC41-0603-CG-50V-822J", Code=C1608C0G1H822JT000N, CompType=Capacitor, DistributorCode=C445716
C55: library part 1nF/0805/250V, "精度 ±10%  / 容值 1nF  / 额定电压 250V  / 温漂系数（介质材料) X7R", A_Manufacturer=元六, Manufacturer=FH(风华), Package=0805, A_ComType=二类电容, Code=0805B102K251NT, CompType=Capacitor, DistributorCode=C285058
D1: "LED SMD贴片0603顶部发光 / 黄色雾状胶体，高亮白色光 / 电压VF:2.6-3.1V@5mA / 亮度Iv:228-450mcd@5mA / 坐标x:0.3,y:0.3 / 发光角度:120deg", A_Manufacturer=-, Manufacturer=MEIHUA(美华科技), Package=0603, A_Code=-, A_ComType=-, Code=MHT192WDT-C2, CompType=LED, DistributorCode=C389521
G1: "地焊盘"
J1: "Header, 4-Pin", A_Manufacturer=-, A_Code=-, A_ComType=-, Code=-, CompType=-, DistributorCode=-, Manufacturer=-, Package=-
J2: library part 73412-0110, "RF同轴连接器（天线座）", Manufacturer=MOLEX, Package=SMD, Code=734120110, CompType=IPEX插座, DistributorCode=C434806
J3: "MX1.25 直插 镀锡 5P 针座", A_Manufacturer=-, Manufacturer=MOLEX, Package="1.25mm 5p", A_Code=-, A_ComType=-, Code=530470510, CompType=连接器, DistributorCode=C471412
L1: library part 6.8uH/0805_1, "精度 ±20%  / 电感值 6.8uH  / 直流电阻（内阻） 400mΩ  / 额定电流 220mA", A_Manufacturer=振华富, Manufacturer=TDK, Package=0805, A_Code=PI2012F6R8, A_ComType=-, Code=MLZ2012M6R8HT000, CompType=Inductor, DistributorCode=C524463
MH1 MH2: library part HOLE_2-5_3, "定位孔", A_Manufacturer=-, A_Code=-, A_ComType=-, Code=-, CompType=-, DistributorCode=-, Manufacturer=-, Package=-
P1: "Header, 3-Pin", A_Manufacturer=-, A_Code=-, A_ComType=-, Code=-, CompType=-, DistributorCode=-, Manufacturer=-, Package=-
P2 P3A P3B P3C: "Header, 2-Pin", A_Manufacturer=-, A_Code=-, A_ComType=-, Code=-, CompType=-, DistributorCode=-, Manufacturer=-, Package=-
R1: library part 330R/0603, "精度 ±1%  / 温度系数 ±100ppm/℃  / 阻值 330Ω  / 功率 0.1W", A_Manufacturer=718, Manufacturer=FH(风华), Package=0603, A_Code=J-RM1608(0603)-K-B-330R-F, A_ComType=RM型片式膜固定电阻器, Code=RS-03K3300FT, CompType=Resistor, DistributorCode=C125768
R2 R3 R4 R6: library part 0R/0603, "精度 ±1%  / 阻值 0Ω  / 功率 0.1W", A_Manufacturer=718, Manufacturer=FH(风华), Package=0603, A_Code=J-RM1608(0603)-K-B-0R-F, A_ComType=RM型片式膜固定电阻器, Code=RS-03000FT, CompType=Resistor, DistributorCode=C136582
R5 R9A R9B R9C: library part 100K/0603, "精度 ±1%  / 阻值 100kΩ  / 温度系数 ±100ppm/℃  / 功率 0.1W", A_Manufacturer=718, Manufacturer=FH(风华), Package=0603, A_Code=J-RM1608(0603)-K-B-100K-F, A_ComType=RM型片式膜固定电阻器, Code=RS-03K1003FT, CompType=Resistor, DistributorCode=C115320
R7 R22A R22B R22C: library part 10K/0603, "精度 ±1%  / 温度系数 ±100ppm/℃  / 阻值 10kΩ  / 功率 0.1W", A_Manufacturer=718, Manufacturer=FH(风华), Package=0603, A_Code=J-RM1608(0603)-K-B-10K-F, A_ComType=RM型片式膜固定电阻器, Code=RS-03K1002FT, CompType=Resistor, DistributorCode=C115324
R8A R8B R8C R13A R13B R13C: library part 100M/0805, "精度 ±1%  / 温度系数 ±100ppm/℃  / 功率 0.125W", A_Manufacturer=718, Manufacturer=UNI-ROYAL(厚声), Package=0805, A_Code=J-RM2012(0805)-K-B-100M-F, Code=0805W8F1006T5E, CompType=Resistor, DistributorCode=C169373
R10A R10B R10C: library part 24.9K/0603, "精度 ±1%  / 温度系数 ±100ppm/℃  / 阻值 24.9kΩ  / 功率 0.1W", A_Manufacturer=718, Manufacturer=FH(风华), Package=0603, A_Code=J-RM1608(0603)-K-B-24.9K-F, Code=RS-03K2492FT, CompType=Resistor, DistributorCode=C321809
R11A R11B R11C R12A R12B R12C: library part 1K/0603, "精度 ±1%  / 温度系数 ±100ppm/℃  / 阻值 1kΩ  / 功率 0.1W", A_Manufacturer=718, Manufacturer=FH(风华), Package=0603, A_Code=J-RM1608(0603)-K-B-1K-F, A_ComType=RM型片式膜固定电阻器, Code=RS-03K1001FT, CompType=Resistor, DistributorCode=C115325
R14A R14B R14C: library part 200K/0603, "精度 ±1%  / 温度系数 ±100ppm/℃  / 功率 0.1W  / 阻值 200kΩ", A_Manufacturer=718, Manufacturer=FH(风华), Package=0603, A_Code=J-RM1608(0603)-K-B-200K-F, Code=RS-03K2003FT, CompType=Resistor, DistributorCode=C95331
R15A R15B R15C: library part 330K/0603, "精度 ±1%  / 温度系数 ±100ppm/℃  / 功率 0.1W", A_Manufacturer=718, Manufacturer=FH(风华), Package=0603, A_Code=J-RM1608(0603)-K-B-330K-F, Code=RS-03K3303FT, CompType=Resistor, DistributorCode=C286584
R16A R16B R16C: library part 47.5K/0603, "精度 ±1%  / 阻值 47.5kΩ  / 温度系数 ±100ppm/℃  / 功率 0.1W", A_Manufacturer=718, Manufacturer=FH(风华), Package=0603, A_Code=J-RM1608(0603)-K-B-47.5K-F, A_ComType=RM型片式膜固定电阻器, Code=RS-03K4752FT, CompType=Resistor, DistributorCode=C321924
R17A R17B R17C: library part 110K/0603, "精度 ±1%  / 温度系数 ±100ppm/℃  / 功率 0.1W  / 阻值 110kΩ", A_Manufacturer=718, Manufacturer=FH(风华), Package=0603, A_Code=J-RM1608(0603)-K-B-107K-F, A_ComType=RM型片式膜固定电阻器, Code=RS-03K1103FT, CompType=Resistor, DistributorCode=C304689
R18A R18B R18C: library part 17.4K/0603, "精度 ±1%  / 温度系数 ±100ppm/℃  / 阻值 17.4kΩ  / 功率 0.1W", A_Manufacturer=718, Manufacturer=FH(风华), Package=0603, A_Code=J-RM1608(0603)-K-B-17.4K-F, Code=RS-03K1742FT, CompType=Resistor, DistributorCode=C304711
R19A R19B R19C: library part 34.8K/0603, "精度 ±1%  / 阻值 34.8kΩ  / 温度系数 ±100ppm/℃  / 功率 0.1W", A_Manufacturer=718, Manufacturer=FH(风华), Package=0603, A_Code=J-RM1608(0603)-K-B-34.8K-F, Code=RS-03K3482FT, CompType=Resistor, DistributorCode=C321868
R20A R20B R20C: library part 10.7K/0603, "精度 ±1%  / 温度系数 ±100ppm/℃  / 阻值 10.7kΩ  / 功率 0.1W", A_Manufacturer=718, Manufacturer=FH(风华), Package=0603, A_Code=J-RM1608(0603)-K-B-10.7K-F, Code=RS-03K1072FT, CompType=Resistor, DistributorCode=C321678
R21A R21B R21C: library part 26.1K/0603, "精度 ±1%  / 温度系数 ±100ppm/℃  / 功率 0.1W  / 阻值 26.1kΩ", A_Manufacturer=718, Manufacturer=FH(风华), Package=0603, A_Code=J-RM1608(0603)-K-B-26.1K-F, Code=RS-03K2612FT, CompType=Resistor, DistributorCode=C321818
R23A R23B R23C: library part 17.8K/0603, "精度 ±1%  / 温度系数 ±100ppm/℃  / 功率 0.1W", A_Manufacturer=718, Manufacturer=FH(风华), Package=0603, A_Code=J-RM1608(0603)-K-B-17.8K-F, Code=RS-03K1782FT, CompType=Resistor, DistributorCode=C310271
U1: "RF-MCU", Manufacturer=TI(德州仪器), Package=VQFN-32, Code=CC1310F128RSMR, CompType=MCU
U2: Manufacturer=-, Package=P1X1, Code=-, DistributorCode=-
U3: "863 - 960MHz / -40 to +85°C / 3Fo Attenuation (2589-2784MHz) 50dB / 2Fo Attenuation (1726-1856MHz) 59dB", Manufacturer="Johanson Technology", Package=8P0805, Code=0900LP15B0063, CompType=低通
U4: "770 - 860 860 - 928MHz / -40°C to +85°C / Pmax 2W", A_Manufacturer=-, Manufacturer="Johanson Technology", Package=6P0603, A_Code=-, A_ComType=-, Code=0850BM14E0016, CompType=Balun, DistributorCode=-
U5: "看门狗", A_Manufacturer=-, Manufacturer=TI(德州仪器), Package=SOT23-Thin-6, A_Code=-, A_ComType=-, Code=TPL5010DDCR, CompType=看门狗, DistributorCode=C473912
U6: "负载开关", Manufacturer=TI(德州仪器), Package=SOT23-6, Code=TPS22860DBVR, CompType=模拟开关, DistributorCode=C132005
U7 U11: "输出电压（最小值/固定） 0.9V  / 输出电流 7mA  / 输出电压（最大值） -  / 输入电压 2 V ~ 5.5 V  / 电源电流 1.5uA  / 输出类型 固定  / 工作温度 -40°C ~ 85°C(TA)  / 温度系数 50ppm/°C  / 阴极电流 -  / 精度 ±0.7%  / 参考源类型 系列", Manufacturer=Intersil(英特矽尔), Package=SOT23-3, Code=ISL21080DIH309Z-TK, CompType=电源参考, DistributorCode=C152443
U8A U8B U8C: "电源电压 1.8V ~ 5.5V, ±0.9V ~ 2.75V / 增益带宽积（GBP） 350kHz  / 压摆率（SR） 0.16 V/us  / 工作温度 -40°C ~ 125°C", A_Manufacturer=-, Manufacturer=TI(德州仪器), Package=SC-70-5, A_Code=-, A_ComType=-, Code=TLV333IDCK, CompType=运放, DistributorCode=C181502
U9A U9B U9C: "增益带宽积（GBP） 1MHz  / 放大器组数 1  / 输出类型 Rail-to-Rail  / 运放类型 General Purpose  / 各通道功耗 50uA  / 压摆率（SR） 0.5 V/us  / 工作温度 -40°C ~ 125°C  / 电源电压 1.8V ~ 5.5V", A_Manufacturer=-, Manufacturer=TI(德州仪器), Package=SC-70-5, A_Code=-, A_ComType=-, Code=OPA313IDCKR, CompType=运放, DistributorCode=C129150
U10A U10B U10C: "电源电压 1.8V ~ 5.5V, ±0.9V ~ 2.75V / 增益带宽积（GBP） 350kHz  / 压摆率（SR） 0.16 V/us  / 工作温度 -40°C ~ 125°C", Manufacturer=TI(德州仪器), Package=SOIC-14, Code=TLV4333IDR, CompType=运放, DistributorCode=C140298
X1: library part "FA-128 24.000000MHz 12pF ±10ppm", "商品目录 贴片晶体谐振器（无源）  / 等效串联电阻（ESR） 60Ω  / 晶振类型 无源贴片晶振  / 主频 24MHz  / 频率公差 ±10ppm  / 负载电容值 12pF  / 工作温度 -40℃~85℃", A_Manufacturer=-, Manufacturer=EPSON(爱普生), Package=SMD-2016, A_Code=-, A_ComType=-, Code="FA-128 24.000000MHz 12pF ±10ppm", CompType=晶振, DistributorCode=C255882
X2: library part X1A000061002100, "X1A000061002100 / 等效串联电阻（ESR） 90kΩ  / 晶振类型 无源贴片晶振  / 主频 32.768KHz  / 频率公差 ±20ppm  / 负载电容值 6pF  / 工作温度 -40℃ ~ +85℃", A_Manufacturer=-, Manufacturer=EPSON(爱普生), Package=SMD-2012, A_Code=-, A_ComType=-, Code="FC-12M 32.768kHz 6pF ±20ppm", CompType=晶振, DistributorCode=C255767

## Via types
v1: diameter 17.72/19.68/19.68/19.68 (per signal layer), hole 7.87, Top Layer to Bottom Layer, tented both sides, 80 vias
v2: diameter 17.72, hole 7.87, Top Layer to Bottom Layer, tented both sides, 14 vias

## Nets (pads, with @x,y where several pads share a name; then routed paths per layer and width w, separated by ;. In a path a pad name is that pad's centre, name@x,y a point inside that pad or via, vN(x,y) a via of type N, cw(c..) or ccw(c..) an arc to the next point about the centre after c; other vN are vias at no path point)
Done: U1.16 U5.4 | length 664.4
  Top Layer w6: v1(-706,401) -706,423 -679,450 -679,482 -552.8,608.2 -514.36,608.2 ccw(c-510.89,641.77) -507.42,608.2 -505.8,608.2 -505.55,608.45 ccw(c-510.89,641.77) -483.6,621.92 ccw(c-492.5,686.64) -481.36,622.26 ccw(c-492.5,686.64) -442.38,644.73 -441.11,646 -433.98,646 ccw(c-425.65,690.98) -417.33,646 -359,646 -337,624 U1.16@-306.99,624
  Bottom Layer w6: v1(-706,401) -660.6,355.6 U5.4@-598.13,355.6
GND: C1.1 C2.1 C3.1 C4.2 C7.2 C8.1 C9.2 C10.2 C11.2 C12.2 C13.2 C14.2 C15.1 C16.1 C17.1 C18.1 C19.1 C20.1 C21.1 C22.1 C23.1 C24.1 C26.2 C27.2 C28A.2 C28B.2 C28C.2 C31A.2 C31B.2 C31C.2 C32A.2 C32B.2 C32C.2 C33A.2 C33B.2 C33C.2 C34A.1 C34B.1 C34C.1 C39A.1 C39B.1 C39C.1 C40A.2 C40B.2 C40C.2 C41A.1 C41B.1 C41C.1 C42A.1 C42B.1 C42C.1 C43.1 C44.1 C45.1 C46.1 C47.1 C48.1 C49.1 C50.1 C51.1 C52.1 C53.2 C54.2 C55.1 D1.1 G1.1 J1.4 J2.2 J2.3 J2.4 J3.2 P1.3 P2.2 R7.2 R9A.2 R9B.2 R9C.2 R15A.2 R15B.2 R15C.2 U1.3 U1.7 U1.17 U1.20 U1.29 U1.33 U3.1 U3.3 U3.5 U3.7 U4.5 U4.6 U5.2 U6.2 U7.3 U8A.2 U8B.2 U8C.2 U9A.2 U9B.2 U9C.2 U10A.11 U10B.11 U10C.11 U11.3 X1.2 X1.4 | length 888.7
  Top Layer w15: v1(-486,-237) -446.89,-237 -363.56,-320.33 U10A.11@-363.56,-348.33 -363.5,-348.39 C41A.1@-363.44,-428.33 C41A.1@-363.44,-428.33 C40A.2@-313.56,-428.33 ; v1(181.94,-52.4) 181.94,-13.29 U10C.11@265.27,70.04 ; v1(182.49,-546.06) 182.49,-506.95 U10B.11@265.82,-423.62 ; U10C.11@293.33,70.1 293.39,70.16 373.27,70.16 C41C.1@373.33,70.22 C40C.2@373.33,120.1 ; U10B.11@293.88,-423.56 293.94,-423.5 373.82,-423.5 C41B.1@373.88,-423.44 C40B.2@373.88,-373.56
  other v1: 265,-740 390,-695 225,-465 600,-320 -405,-275 -650,-115 -630,-45 -270,-25 225,30 -100,105 -45,165 -348,266 -745,320 -228,377 215,380 295,380 365,380 -15,400 60,400 128,441 -68,446 -110,447 368,474 248,479 306,479 191,480 -40,485 18,486 78,486 -479,487 612,500 -280,519 -220,519 16,551 -46,553 78,555 189,558 287,564 364,568 -280,576 -220,576 133,603 197,647 476,658 -283,784 -125,801
  other v2: -315,-530 475,-390 -65,-320 -215,-255 175,170 480,440 410,520 480.12,520 540,520 480,605 340,675
NetC1_2: C1.2 C2.2 C3.2 L1.1 U1.28 U1.32 | length 759.9
  Top Layer w8: C2.2@-316.44,343 -316.44,344.12 -303.85,356.72 -302.72,356.72 -259.75,399.69 U1.28@-259.75,474.39 ; U1.32@-196.76,474.39 -196.76,444.76 v1(-172,420) -170.14,418.14 -147.07,418.14 -136.56,407.63 C3.2@-136.56,407
  Top Layer w10: C1.2@-539.31,527.72 L1.1@-473.69,567.28
  Top Layer w20: C1.2@-539.31,527.72 -529.54,517.95 -490.95,517.95 v1(-489,516)
  Bottom Layer w20: v1(-489,516) -406,516 -298,408 v1(-263,408) -184,408 v1(-172,420)
NetC4_1: C4.1 U1.6 X2.2 | length 222
  Top Layer w6: U1.6@-177.07,572.82 -142.18,572.82 -130,585 -130,655 -118.04,666.96 -93.57,666.96 X2.2@-85,675.53 -87.41,675.53 -98.19,686.31 C4.1@-98.19,715
NetC5_1: C5.1 U4.1 | length 50.6
  Top Layer w11.55: U4.1@-71.63,520.37 -71.63,520.32 -71.5,520.18 -21.37,520.18 C5.1@-21.19,520
NetC5_2: C5.2 U3.4 | length 65.8
  Top Layer w11.55: C5.2@15.19,520 U3.4@81,520
NetC6_1: C6.1 U3.8 | length 61.6
  Top Layer w11.55: U3.8@179.43,520 C6.1@241,520
NetC6_2: C6.2 U2.1 | length 73.8
  Top Layer w11.55: C6.2@288.24,520 U2.1@362,520
NetC6_3: C6.3 J2.1 | length 119.5
  Top Layer w11.55: C6.3@241,567.24 241,633.06 J2.1@278.94,671
NetC7_1: C7.1 U1.5 X2.1 | length 129.3
  Top Layer w6: U1.5@-177.07,557.07 -122.93,557.07 -100.24,579.76 -88.19,591.81 -88.19,613.28 X2.1@-85,616.47
NetC8_2: C8.2 U1.12 | length 99.5
  Top Layer w8: v1(-245,690) -244.06,689.06 -244.06,624.06 U1.12@-244,624
  Bottom Layer w8: v1(-245,690) -244.19,690.81 -244.19,721.63 C8.2@-245,722.44
NetC25A_1: C25A.1 C29A.2 R8A.2 U9A.4 | length 211.6
  Bottom Layer w6: C25A.1@-570,-296.46 -569.73,-296.18 -433.42,-296.18 -429.54,-292.31 U9A.4@-429.54,-285.15 -429.54,-232.75 C29A.2@-422.56,-225.76
NetC25A_2: C25A.2 R8A.1 R12A.2 U9A.3 | length 204.3
  Bottom Layer w6: C25A.2@-570,-367.32 R8A.1@-495,-367.32 -433.42,-367.32 -429.54,-371.2 U9A.3@-429.54,-373.73 -429.54,-405 -448.88,-424.33 R12A.2@-450,-424.33
NetC25B_1: C25B.1 C29B.2 R8B.2 U9B.4 | length 211.6
  Bottom Layer w6: C29B.2@171.31,-482.56 178.3,-489.54 U9B.4@230.7,-489.54 237.86,-489.54 241.74,-493.42 241.74,-629.73 C25B.1@242.01,-630
NetC25B_2: C25B.2 R8B.1 R12B.2 U9B.3 | length 204.3
  Bottom Layer w6: C25B.2@312.87,-630 R8B.1@312.87,-555 312.87,-493.42 316.75,-489.54 U9B.3@319.28,-489.54 350.55,-489.54 369.88,-508.88 R12B.2@369.88,-510
NetC25C_1: C25C.1 C29C.2 R8C.2 U9C.4 | length 211.6
  Bottom Layer w6: C29C.2@170.76,11.1 177.75,4.12 U9C.4@230.15,4.12 237.31,4.12 241.19,0.24 241.19,-136.07 C25C.1@241.46,-136.34
NetC25C_2: C25C.2 R8C.1 R12C.2 U9C.3 | length 204.3
  Bottom Layer w6: C25C.2@312.32,-136.34 R8C.1@312.32,-61.34 312.32,0.24 316.2,4.12 U9C.3@318.73,4.12 350,4.12 369.33,-15.22 R12C.2@369.33,-16.34